# EAGLE board RFID_Eval_13.56MHz-v14 (EAGLE 8.6.3)
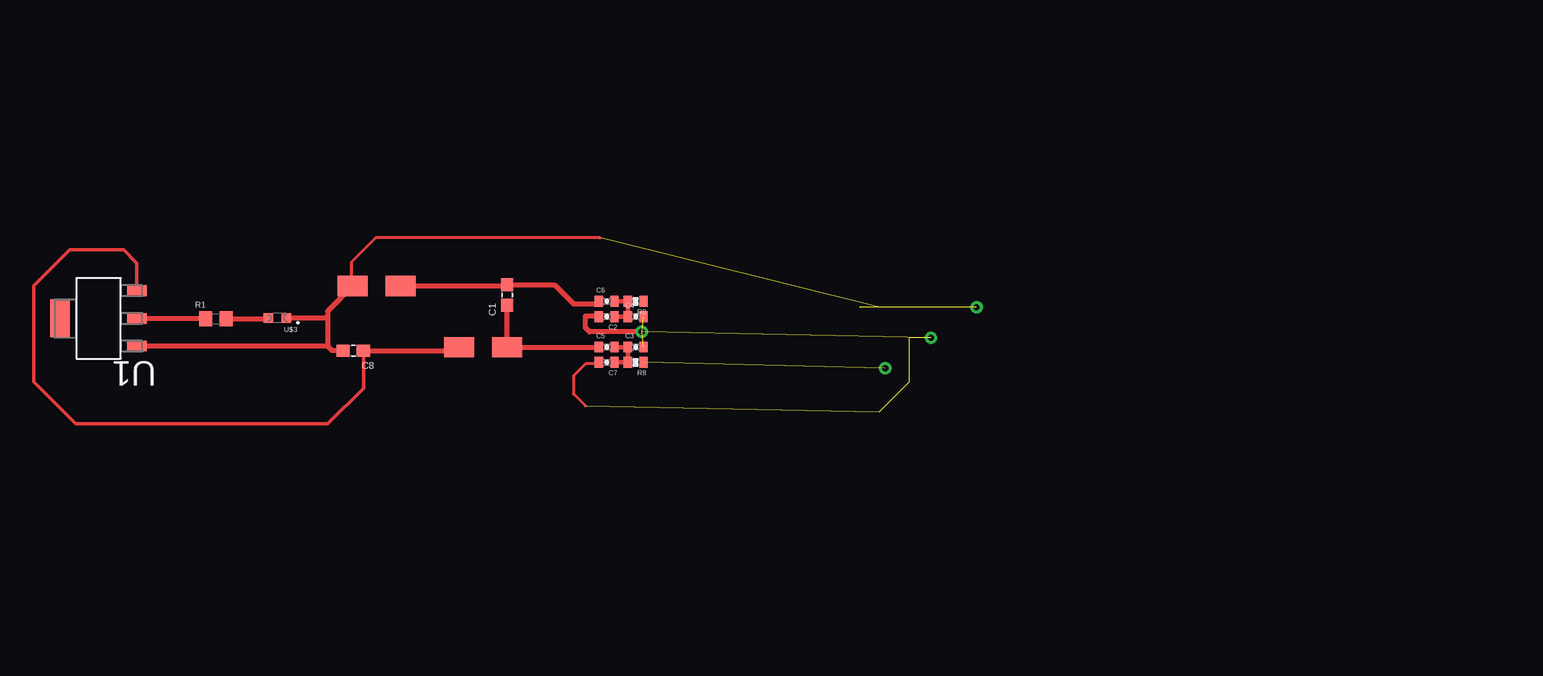
[diagram p0: board, top side]
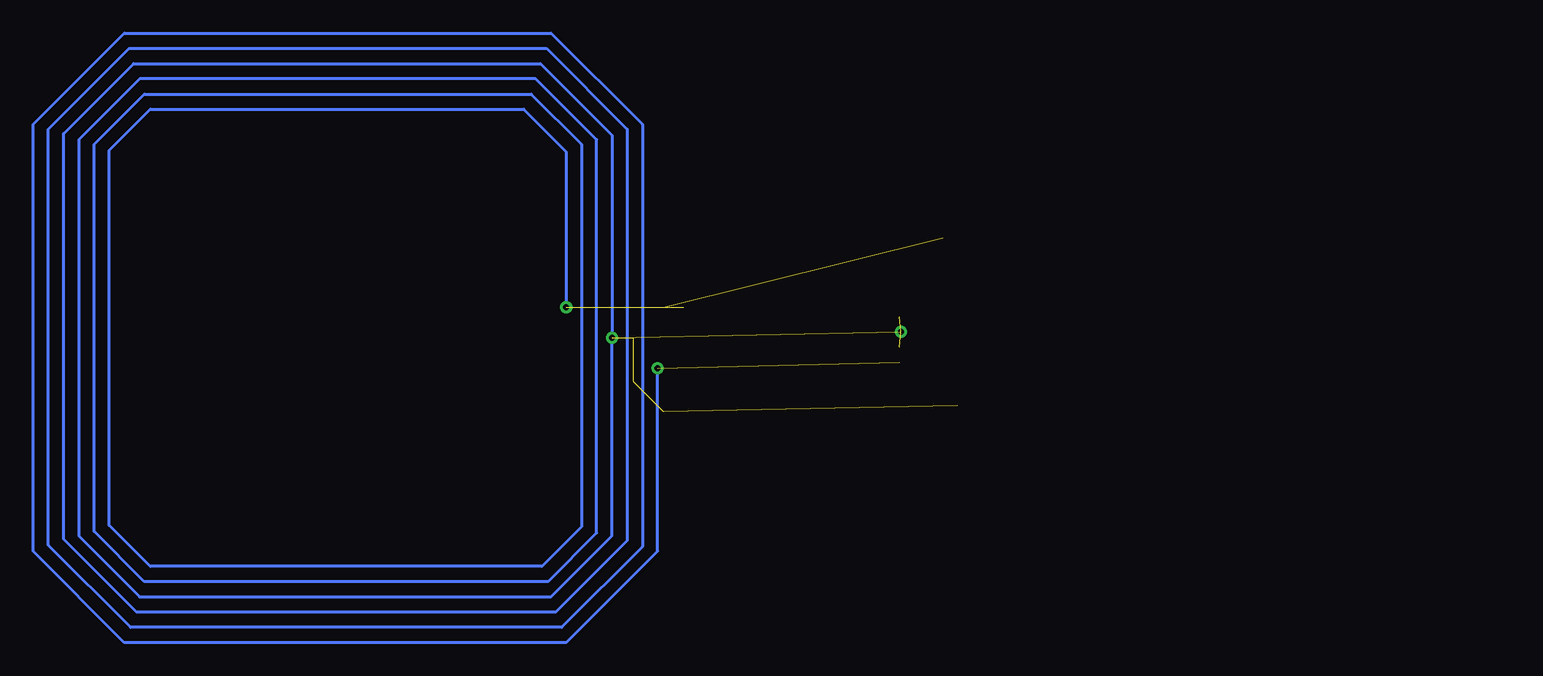
[diagram p1: board, bottom side, seen from below]

No outline drawn. Coordinates in mm, seen from the top.
Copper layers (1*16): Top 0.035mm / dielectric 1.5mm / Bottom 0.035mm
Design rules "SparkFun": minimum track width 8mil, minimum drill 20mil, track to track 8mil, track to pad 8mil, pad to pad 8mil, via to via 8mil, smd to smd 8mil, copper to edge 8mil, drill to drill 8mil, minimum pad ring 12mil, minimum via ring 10mil, stop-mask expansion 4mil, vias tented up to drill 20mil, thermal gap 10mil

## Footprints (pad centres in the part's own frame; a part is rotated, then mirrored left to right if it is on the bottom)
CAPC1608X90 = smd 1.1 x 1: 1 -0.85,0; 2 0.85,0
0402-CAP = smd 0.7 x 0.9: 1 -0.65,0; 2 0.65,0
RESC1608X55 = smd 1.1 x 1.25: 1 -0.85,0; 2 0.85,0
0402-RES = smd 0.7 x 0.9: 1 -0.65,0; 2 0.65,0
SOT230P700X180-4N = smd 1.626 x 0.889: 1 -3.2,2.311; 2 -3.2,0; 3 -3.2,-2.311 | smd 1.626 x 3.175: 4 3.2,0
SMA-DIODE = smd 2.5 x 1.7: 1 -1.992,0.015; 2 2.008,0.015
LEDM1608X80 = smd 0.8 x 0.8: A 0.75,0; C -0.75,0

## Placement (x,y rotation side)
C1  06036D225KAT2A  [CAPC1608X90]  30.98,30.24 90 top
C2  22pF  [0402-CAP]  39.28,28.44 180 top
C3  27pF  [0402-CAP]  41.69,25.9 0 top
C4  27pF  [0402-CAP]  41.69,28.44 0 top
C5  18pF  [0402-CAP]  39.28,25.9 0 top
C6  18pF  [0402-CAP]  39.28,29.71 0 top
C7  22pF  [0402-CAP]  39.28,24.63 180 top
C8  06036D225KAT2A  [CAPC1608X90]  18.14,25.6 180 top
R1  CRCW06033K30FKEA  [RESC1608X55]  6.7,28.25 0 top
R8  0 Ohm  [0402-RES]  41.69,24.63 180 top
R9  0 Ohm  [0402-RES]  41.69,29.71 180 top
U1  TLV1117-18IDCYG3  [SOT230P700X180-4N]  -3.09,28.29 180 top
U$1  B220A-13-F  [SMA-DIODE]  28.99,25.9 180 top
U$2  B220A-13-F  [SMA-DIODE]  20.1,30.98 0 top
U$3  LED  [LEDM1608X80]  11.83,28.33 180 top

## Library data of the parts
C1 C8 = Capacitor_2.2uF_0603; DESCRIPTION: 0603 2.2 uF 6.3 V ±10 % Tolerance X5R Surface Mount Multilayer Ceramic Capacitor; DIGI-KEY_PART_NUMBER: 478-1252-1-ND; DIGI-KEY_PURCHASE_URL: https://www.digikey.co.uk/product-detail/en/avx-corporation/06036D225KAT2A/478-1252-1-ND/564284?utm_source=snapeda&utm_medium=aggregator&utm_campaign=symbol; MF: AVX; MP: 06036D225KAT2A; PACKAGE: 0603 AVX
C2-C7 R8 R9 = SparkFun
R1 = CRCW06033K30FKEA; DESCRIPTION: Res Thick Film 0603 3.3K Ohm 1% 0.1W_1/10W_ ?100ppm/C SMD Automotive Paper T/R; DIGI-KEY_PART_NUMBER: 541-3.30KHCT-ND; DIGI-KEY_PURCHASE_URL: https://www.digikey.com/product-detail/en/vishay-dale/CRCW06033K30FKEA/541-3.30KHCT-ND/1179866?utm_source=snapeda&utm_medium=aggregator&utm_campaign=symbol; MF: Vishay Dale; MP: CRCW06033K30FKEA; PACKAGE: 0603 Vishay
U1 = TLV1117-18IDCYG3; AVAILABILITY: Unavailable; DESCRIPTION: Single Output LDO, 800mA, Fixed and Adj., Internal Current limit, Thermal Overload Protection 4-SOT-223 -40 to 125; MF: Texas Instruments; MP: TLV1117-18IDCYG3; PACKAGE: SOT-223 Texas Instruments; PRICE: None
U$1 U$2 = Schottky_0603; DESCRIPTION: B220A Series 20 V 2 A Surface Mount Schottky Barrier Rectifier - SMA; DIGI-KEY_PART_NUMBER: B220A-FDICT-ND; DIGI-KEY_PURCHASE_URL: https://www.digikey.co.uk/product-detail/en/diodes-incorporated/B220A-13-F/B220A-FDICT-ND/751528?utm_source=snapeda&utm_medium=aggregator&utm_campaign=symbol; MF: Diodes Inc.; MP: B220A-13-F; PACKAGE: DO-214 Diodes Inc.
U$3 = LEDM1608X80

## Nets
ANT1: C1.1 C5.1 U$1.1
ANT2: C1.2 C6.1 U$2.2
GND: C2.2 C3.2 C4.2 C7.2 C8.2 U1.1 U$2.1 U$3.C
N$1: R1.1 U1.2
N$2: R1.2 U$3.A
N$4: C8.1 U1.3 U$1.2
N$8: R8.1
N$9: R9.1
N$10: C3.1 C5.2 C7.1 R8.2
N$11: C2.1 C4.1 C6.2 R9.2

## Tracks (layer width: path | path; a pad name or v marks a point on that pad's centre or on a via)
ANT1
  Top 0.406: C1.1 U$1.1 38.61,25.89 C5.1
ANT2
  Top 0.406: C6.1 38.42,29.5 36.5,29.5 34.91,31.09 C1.2 30.89,31 U$2.2
GND  (via drill 0.51)  (10 unrouted)
  Top 0.254: v42.2,27.17 41.69,27.17 | 38.71,35 20,35 18,33 18,31.1 U$2.1 | C7.2 38.5,24.5 37.5,24.5 36.5,23.5 36.5,22 37.5,21
  Top 0.406: 16,25.98 U1.1 | C8.2 16.38,25.6 16,25.98 | U$2.1 16,28.89 16,28.5 | 16,28.5 16,25.98 | v42.2,27.17 37.83,27.17 37.5,27.5 37.5,28.5 38.57,28.5 C2.2 | U$3.C 15.83,28.33 16,28.5
  Bottom 0.254: v66.29,26.67 66.29,10.16 71.37,5.08 105.66,5.08 110.74,10.16 110.74,43.18 105.66,48.26 72.64,48.26 67.56,43.18 67.56,10.41 71.63,6.35 105.28,6.35 109.47,10.54 109.47,42.8 105.28,46.99 73.03,46.99 68.83,42.8 68.83,10.92 72.14,7.62 104.78,7.62 108.2,11.05 108.2,42.29 104.78,45.72 73.66,45.72 70.1,42.16 v70.1,29.21
N$1
  Top 0.406: U1.2 5.81,28.29 R1.1
N$2
  Top 0.406: R1.2 11,28.25 U$3.A
N$4
  Top 0.305: C8.1 18.99,22.49 16,19.5 -5,19.5 -8.5,23 -8.5,31 -5.5,34 -1,34 0.11,32.89 U1.3
  Top 0.406: C8.1 26.7,25.6 U$1.2
N$8  (via drill 0.51)  (1 unrouted)
  Bottom 0.254: v62.48,24.13 62.48,8.89 70.1,1.27 106.93,1.27 114.55,8.89 114.55,44.45 106.93,52.07 71.37,52.07 63.75,44.45 63.75,9.27 70.48,2.54 106.43,2.54 113.28,9.4 113.28,44.07 106.55,50.8 71.75,50.8 65.02,44.07 65.02,9.78 70.99,3.81 105.92,3.81 112.01,9.91 112.01,43.69 106.17,49.53 72.26,49.53 66.29,43.56 66.29,26.67
N$10
  Top 0.381: C5.2 C3.1 R8.2 C7.1
N$11
  Top 0.381: C6.2 R9.2 C4.1 C2.1